# Altium PCB Indicator.PcbDoc
Units mil, origin at the board's own origin, x right, y up, seen from the top; angles counter-clockwise.
Board outline 3937.01 x 3937.01 mil, 2 copper layers (Top Layer, Bottom Layer); 75 components, 110 nets, 397 pads, 14 vias.
Unrouted connection lines stored in the file: 3.
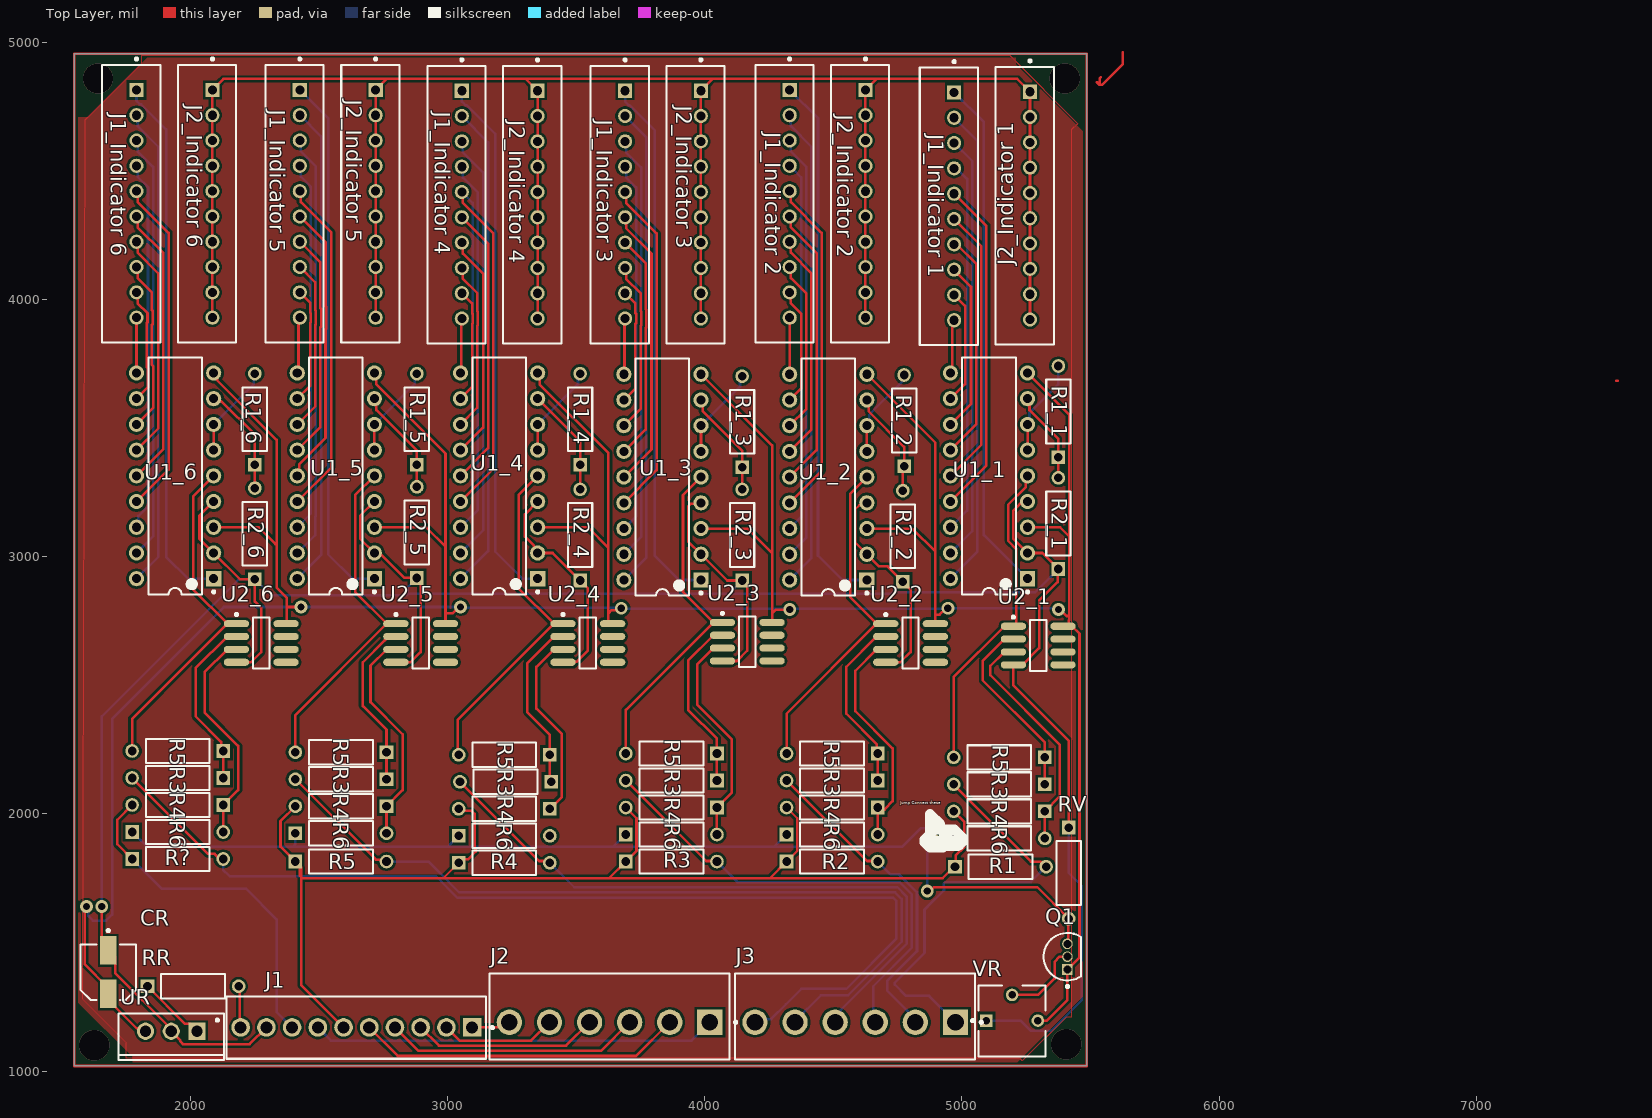
[diagram p0: Top Layer view]
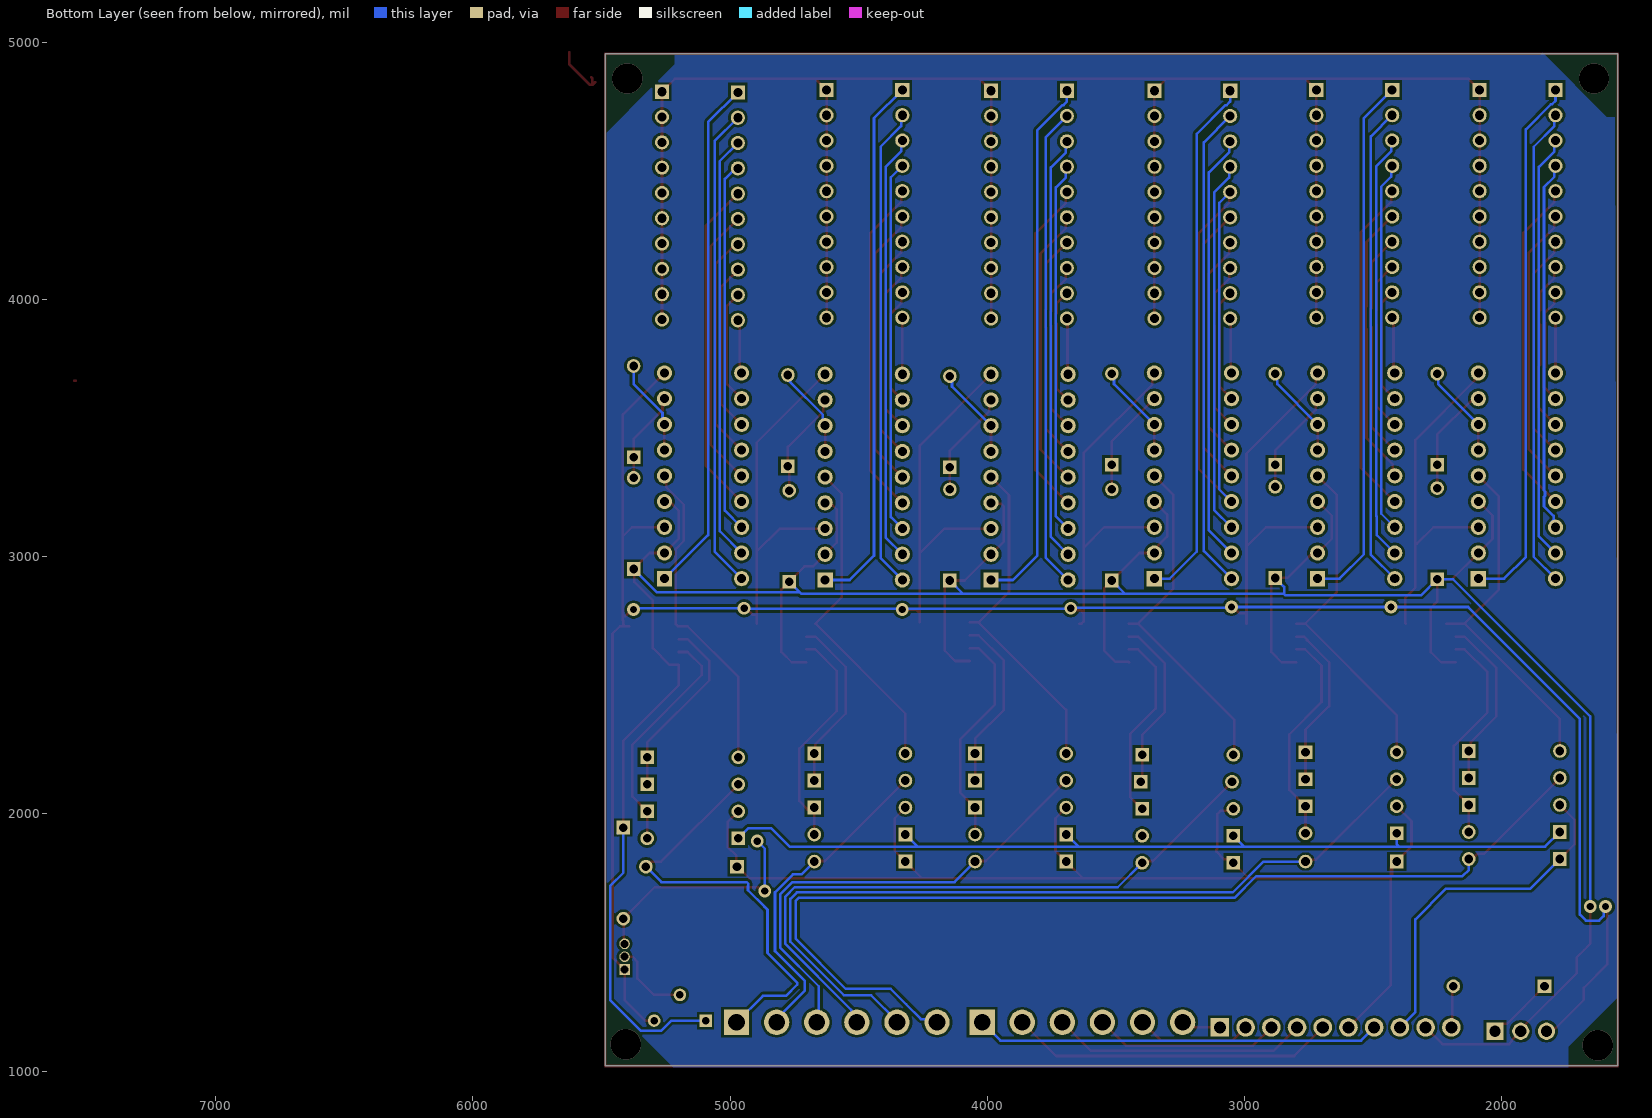
[diagram p1: Bottom Layer view, seen from below]

## Layer stack, top to bottom
Top Solder: solder mask 0.4, Solder Resist, Dk 3.5
Top Layer: signal copper 1.4
Dielectric 1: dielectric 12.6, FR-4, Dk 4.8
Bottom Layer: signal copper 1.4
Bottom Solder: solder mask 0.4, Solder Resist, Dk 3.5

## Board outline
1547.99,1020 1547.99,4957.01 5485,4957.01 5485,1020

## Design rules (kind name [scope] priority, off if disabled: settings)
Clearance [All] p1: gap=10 ignorepadtopadclearanceinfootprint=FALSE
PolygonConnect [All] p1: connectstyle=Relief reliefconductorwidth=10 reliefentries=4 polygonreliefangle="90 Angle" airgapwidth=10
RoutingVias [All] p1: holewidth=28 width=50 viastyle="Through Hole" minholewidth=28 minwidth=50 maxholewidth=28 maxwidth=50
SolderMaskExpansion [All] p1: expansion=4 istentingtop=FALSE
Width [All] p1: maxlimit=10 minlimit=10 preferedwidth=10
30 further rules are at their usual default settings.

## Classes and differential pairs
component class Reference: Q1 RV VR
component class "Indicator 6": " " "J1_Indicator 6" "J2_Indicator 6" R1_6 R2_6 R3 R4 R5 R6 U2_6
channel class Indicator: "Indicator 1" "Indicator 2" "Indicator 3" "Indicator 4" "Indicator 5" "Indicator 6"
component class Top_level: CR J1 J2 J3 R1 R2 R3 R4 R5 R? RR UR
component class "Indicator 5": " " "J1_Indicator 5" R2_5 R3 R4 R5 R6 U1_5 U2_5
component class "Indicator 4": "J1_Indicator 4" "J2_Indicator 4" R2_4 R3 R4 R5 R6 U2_4
component class "Indicator 3": "J1_Indicator 3" "J2_Indicator 3" R1_3 R2_3 R3 R4 R5 R6 U1_3 U2_3
component class "Indicator 2": "J1_Indicator 2" "J2_Indicator 2" R1_2 R2_2 R3 R4 R5 R6 U1_2 U2_2
component class "Indicator 1": "J1_Indicator 1" "J2_Indicator 1" "R1_Indicator 1" "R2_Indicator 1" R3 R4 R5 R6 U1_1 U2_1

## Components (designator, comment, footprint, x,y, rotation, side; value= is the part's Value field where it differs from the comment)
CR "EEE-1AA101WR" FP-SC-MFG 1680,1385 r270 top
J1 "22-27-2101" FP-22-27-2101-MFG 2645,1169.21 r0 top
"J1_Indicator 1" "B10B-XH-A(LF)(SN)" FP-B10B-XH-A_LF_SN-MFG 4948.94,4362.91 r90 top (schematic designator J1)
"J1_Indicator 2" "B10B-XH-A(LF)(SN)" FP-B10B-XH-A_LF_SN-MFG 4309.33,4372.91 r90 top (schematic designator J1)
"J1_Indicator 3" "B10B-XH-A(LF)(SN)" FP-B10B-XH-A_LF_SN-MFG 3669.33,4369.49 r90 top (schematic designator J1)
"J1_Indicator 4" "B10B-XH-A(LF)(SN)" FP-B10B-XH-A_LF_SN-MFG 3034.33,4369.49 r90 top (schematic designator J1)
"J1_Indicator 5" "B10B-XH-A(LF)(SN)" FP-B10B-XH-A_LF_SN-MFG 2404.33,4372.91 r90 top (schematic designator J1)
"J1_Indicator 6" "B10B-XH-A(LF)(SN)" FP-B10B-XH-A_LF_SN-MFG 1769.33,4372.91 r90 top (schematic designator J1)
J2 "B6P-VH(LF)(SN)" FP-B6P-VH_LF_SN-MFG 3629.76,1211.65 r180 top
"J2_Indicator 1" "B10B-XH-A(LF)(SN)" FP-B10B-XH-A_LF_SN-MFG 5243.94,4365.79 r90 top (schematic designator J2)
"J2_Indicator 2" "B10B-XH-A(LF)(SN)" FP-B10B-XH-A_LF_SN-MFG 4603.94,4372.64 r90 top (schematic designator J2)
"J2_Indicator 3" "B10B-XH-A(LF)(SN)" FP-B10B-XH-A_LF_SN-MFG 3963.94,4369.49 r90 top (schematic designator J2)
"J2_Indicator 4" "B10B-XH-A(LF)(SN)" FP-B10B-XH-A_LF_SN-MFG 3328.94,4369.49 r90 top (schematic designator J2)
"J2_Indicator 5" "B10B-XH-A(LF)(SN)" FP-B10B-XH-A_LF_SN-MFG 2699.33,4372.91 r90 top (schematic designator J2)
"J2_Indicator 6" "B10B-XH-A(LF)(SN)" FP-B10B-XH-A_LF_SN-MFG 2064.33,4372.91 r90 top (schematic designator J2)
J3 "B6P-VH(LF)(SN)" FP-B6P-VH_LF_SN-MFG 4584.76,1211.65 r180 top
Q1 "BC547B" ONSC-TO-92-3-29-11 5410,1445 r90 top
R1 "MFR-25FBF52-1K" RESA60-630X240 5150,1795 r0 top
R1_1 "MFR-25FBF52-1K" RESA60-630X240 5375,3565 r90 top (schematic designator R1)
R1_2 "MFR-25FBF52-1K" RESA60-630X240 4775,3530 r90 top (schematic designator R1)
R1_3 "MFR-25FBF52-1K" RESA60-630X240 4145,3525 r90 top (schematic designator R1)
R1_4 "MFR-25FBF52-1K" RESA60-630X240 3515,3535 r90 top (schematic designator R1)
R1_5 "MFR-25FBF52-1K" RESA60-630X240 2880,3535 r90 top (schematic designator R1)
R1_6 "MFR-25FBF52-1K" RESA60-630X240 2250,3535 r90 top (schematic designator R1)
R2 "MFR-25FBF52-1K" RESA60-630X240 4495,1815 r0 top
R2_1 "MFR-25FBF52-1K" RESA60-630X240 5375,3130 r90 top (schematic designator R2)
R2_2 "MFR-25FBF52-1K" RESA60-630X240 4770,3080 r90 top (schematic designator R2)
R2_3 "MFR-25FBF52-1K" RESA60-630X240 4145,3085 r90 top (schematic designator R2)
R2_4 "MFR-25FBF52-1K" RESA60-630X240 3515,3085 r90 top (schematic designator R2)
R2_5 "MFR-25FBF52-1K" RESA60-630X240 2880,3095 r90 top (schematic designator R2)
R2_6 "MFR-25FBF52-1K" RESA60-630X240 2250,3090 r90 top (schematic designator R2)
R3 "MFR-25FBF52-1K" RESA60-630X240 3870,1815 r0 top
R3 "MFR-25FBF52-1K" RESA60-630X240 1950,2140 r180 top
R3 "MFR-25FBF52-1K" RESA60-630X240 2585,2135 r180 top
R3 "MFR-25FBF52-1K" RESA60-630X240 3225,2125 r180 top
R3 "MFR-25FBF52-1K" RESA60-630X240 3870,2130 r180 top
R3 "MFR-25FBF52-1K" RESA60-630X240 4495,2130 r180 top
R3 "MFR-25FBF52-1K" RESA60-630X240 5145,2115 r180 top
R4 "MFR-25FBF52-1K" RESA60-630X240 3220,1810 r0 top
R4 "MFR-25FBF52-1K" RESA60-630X240 1950,2035 r180 top
R4 "MFR-25FBF52-1K" RESA60-630X240 2585,2030 r180 top
R4 "MFR-25FBF52-1K" RESA60-630X240 3220,2020 r180 top
R4 "MFR-25FBF52-1K" RESA60-630X240 3870,2025 r180 top
R4 "MFR-25FBF52-1K" RESA60-630X240 4495,2025 r180 top
R4 "MFR-25FBF52-1K" RESA60-630X240 5145,2010 r180 top
R5 "MFR-25FBF52-1K" RESA60-630X240 2585,1815 r0 top
R5 "MFR-25FBF52-1K" RESA60-630X240 1950,2245 r180 top
R5 "MFR-25FBF52-1K" RESA60-630X240 2585,2240 r180 top
R5 "MFR-25FBF52-1K" RESA60-630X240 3220,2230 r180 top
R5 "MFR-25FBF52-1K" RESA60-630X240 3870,2235 r180 top
R5 "MFR-25FBF52-1K" RESA60-630X240 4495,2235 r180 top
R5 "MFR-25FBF52-1K" RESA60-630X240 5145,2220 r180 top
R6 "MFR-25FBF52-1K" RESA60-630X240 1950,1930 r0 top
R6 "MFR-25FBF52-1K" RESA60-630X240 2585,1925 r0 top
R6 "MFR-25FBF52-1K" RESA60-630X240 3220,1915 r0 top
R6 "MFR-25FBF52-1K" RESA60-630X240 3870,1920 r0 top
R6 "MFR-25FBF52-1K" RESA60-630X240 4495,1920 r0 top
R6 "MFR-25FBF52-1K" RESA60-630X240 5145,1905 r0 top
R? "MFR-25FBF52-1K" RESA60-630X240 1950,1825 r0 top
RR "MFR-25FBF52-1K" RESA60-630X240 2010,1330 r0 top
RV "MFR-25FBF52-1K" RESA60-630X240 5415,1770 r270 top
U1_1 "LM3914N-1/NOPB" NFK0018A 5105,3315 r180 top (schematic designator U1)
U1_2 "LM3914N-1/NOPB" NFK0018A 4480,3310 r180 top (schematic designator U1)
U1_3 "LM3914N-1/NOPB" NFK0018A 3835,3310 r180 top (schematic designator U1)
U1_4 "LM3914N-1/NOPB" NFK0018A 3200,3315 r180 top (schematic designator U1)
U1_5 "LM3914N-1/NOPB" NFK0018A 2565,3315 r180 top (schematic designator U1)
U1_6 "LM3914N-1/NOPB" NFK0018A 1940,3315 r180 top (schematic designator U1)
U2_1 "TL072CDG4" TI-D8_M 5296.46,2655 r0 top (schematic designator U2)
U2_2 "TL072CDG4" TI-D8_M 4800,2665 r0 top (schematic designator U2)
U2_3 "TL072CDG4" TI-D8_M 4165,2670 r0 top (schematic designator U2)
U2_4 "TL072CDG4" TI-D8_M 3545,2665 r0 top (schematic designator U2)
U2_5 "TL072CDG4" TI-D8_M 2895,2665 r0 top (schematic designator U2)
U2_6 "TL072CDG4" TI-D8_M 2275,2665 r0 top (schematic designator U2)
UR "L7809CV" TO220 1925,1155 r180 top
VR "3362P-1-104LF" BOUR-3362P 5195,1195 r0 top

## Footprints (in the part's own frame and the unit in brackets; to place one, negate y for a bottom-side part, rotate by r counter-clockwise, add the part's x,y. Pads: shape width x height; smd on the part's side, far side on the other; paste and mask are expansions set on the pad)
BOUR-3362P [mm] "THD, 3-Leads, Body 6.6x6.99mm, Pitch 2.54mm"
  rect 1.25x1.25 hole 0.75: 1(-2.54,0.035)
  round 1.25 hole 0.75: 2(0,2.575) 3(2.54,0.035)
  silkscreen extent -4.02,-3.49 3.3,3.5, body extent -3.3,-3.49 3.3,3.49, height 4.95
FP-22-27-2101-MFG [mm]
  rect 1.84x1.84 hole 1.19 paste-2539.97 mask+0: 1(11.43,0.02)
  round 1.84 hole 1.19 paste-2539.97 mask+0: 2(8.89,0.02) 3(6.35,0.02) 4(3.81,0.02) 5(1.27,0.02) 6(-1.27,0.02) 7(-3.81,0.02) 8(-6.35,0.02) 9(-8.89,0.02) 10(-11.43,0.02)
  silkscreen extent -12.83,-3.08 13.55,3.08, body extent -12.93,-3.17 12.93,3.17, height 0.25
FP-B6P-VH_LF_SN-MFG [mm]
  rect 2.5x2.5 hole 1.65 paste-2539.97 mask+0: 1(-9.9,0.55)
  round 2.5 hole 1.65 paste-2539.97 mask+0: 2(-5.94,0.55) 3(-1.98,0.55) 4(1.98,0.55) 5(5.94,0.55) 6(9.9,0.55)
  silkscreen extent -12.58,-4.25 11.85,4.25, body extent -11.95,-4.35 11.95,4.35, height 0.25
FP-B10B-XH-A_LF_SN-MFG [mm]
  rect 1.4x1.4 hole 0.9 paste-2539.97 mask+0: 1(11.25,-0.525)
  round 1.4 hole 0.9 paste-2539.97 mask+0: 2(8.75,-0.525) 3(6.25,-0.525) 4(3.75,-0.525) 5(1.25,-0.525) 6(-1.25,-0.525) 7(-3.75,-0.525) 8(-6.25,-0.525) 9(-8.75,-0.525) 10(-11.25,-0.525)
  silkscreen extent -13.7,-2.88 14.42,2.88, body extent -13.8,-2.98 13.8,2.98, height 0.25
FP-SC-MFG [mm]
  rect 2.8x1.6 smd paste+0 mask+0: 1(-2.15,0) 2(2.15,0)
  silkscreen extent -4.22,-2.75 2.75,2.75, body extent -3.8,-3 3.8,3, height 0.25
NFK0018A [mm] "DIP, 18-Leads, Body 23.35x6.6mm, Pitch 2.54mm"
  rect 1.5x1.5 hole 0.9: 1(-3.81,10.16)
  round 1.5 hole 0.9: 2(-3.81,7.62) 3(-3.81,5.08) 4(-3.81,2.54) 5(-3.81,0) 6(-3.81,-2.54) 7(-3.81,-5.08) 8(-3.81,-7.62) 9(-3.81,-10.16) 10(3.81,-10.16) 11(3.81,-7.62) 12(3.81,-5.08) 13(3.81,-2.54) 14(3.81,0) 15(3.81,2.54) 16(3.81,5.08) 17(3.81,7.62) 18(3.81,10.16)
  silkscreen extent -3.94,-11.7 2.65,11.7, body extent -4.1,-11.43 4.1,11.43, height 4.21
ONSC-TO-92-3-29-11 [mm] "TO, 3-Leads, Body Dia 4.7mm, Pitch 1.27mm"
  rect 1.05x1.05 hole 0.8: 1(-1.27,0)
  round 1.05 hole 0.8: 2(0,0) 3(1.27,0)
  silkscreen extent -3.07,-1.34 2.35,2.35, body extent -2.35,-1.33 2.36,2.36, height 7.87
RESA60-630X240 [mm] "Axial Resistor, 2-Leads, Dia 2.4mm, Body Length 6.3mm"
  rect 1.35x1.35 hole 0.85: 1(-4.5,0)
  round 1.35 hole 0.85: 2(4.5,0)
  silkscreen extent -3.15,-1.2 3.15,1.2, body extent -3.15,-1.2 3.15,1.2, height 2.4
TI-D8_M [mm] "SOIC, 8-Leads, Body 4.9x3.9mm, Pitch 1.27mm, IPC Low Density"
  oval 2.5x0.7 smd: 1(-2.45,1.905) 2(-2.45,0.635) 3(-2.45,-0.635) 4(-2.45,-1.905) 5(2.45,-1.905) 6(2.45,-0.635) 7(2.45,0.635) 8(2.45,1.905)
  silkscreen extent -2.57,-2.5 0.8,2.93, body extent -2,-2.5 2,2.5, height 1.75
TO220 [mm] "TO, Thru-Hole, Vertical, Heatsink Mounted; 3 In-Line Leads; Pitch 2.54 mm"
  rect 1.7x1.7 hole 1.1: 1(-2.54,0)
  round 1.7 hole 1.1: 2(0,0) 3(2.54,0)
  silkscreen extent -5.2,-1.75 5.2,2.85, body extent -5.25,-1.8 5.25,2.9, height 19.7

## Part data
CR: library part CMP-05427-000047-1, "CAP ALUM 100UF 20% 10V SMD", Capacitance=100uF, Case/Package=Radial, Max Operating Temperature=85°C, Min Operating Temperature=-40°C, Package Quantity=1, Ripple Current=50mA, Tolerance=20%, Voltage Rating=10V, Construction=Cylindrical, Contact Plating=Tin, Diameter=5mm, Height=5.4mm, Height - Seated (Max)=0.213inch, Lead Free="Lead Free", Length=5.5mm, Life (Hours)=1000Hour, Mount="Surface Mount", Packaging="Tape and Reel", Radiation Hardening=No, Ripple Current (AC)=50mA, RoHS Compliant=Yes, Series=S, Termination=SMD/SMT, Voltage Rating (DC)=10V
J1: library part CMP-04776-001036-1, "CONN HEADER VERT 10POS 2.54MM", Color=Natural, Contact Resistance=10mR, Current Rating=4A, Flammability Rating="UL94 V-0", Housing Color=White, Insulation Resistance=50GR, Max Operating Temperature=75°C, Max Voltage Rating (AC)=250V, Min Operating Temperature=0°C, Package Quantity=4000, Contact Material=Brass, Contact Mating Length=0.295inch, Contact Plating=Tin, Contact Type="Male Pin", Depth=5.8mm, Fastening Type=Friction, Gender=Male, Glow Wire Compliant=Non-compliant, Halogen Free="Low Halogen", Height=8.38mm, Housing Material=Nylon, Lead Free="Lead Free", Length=25.4mm, Material=Nylon, Max Current Rating=4A, Mount="Through Hole", Number of Circuits=10, Number of Contacts=10, Number of Positions=10, Number of Rows=1, Orientation=Straight, Packaging=Bulk, Pitch=2.54mm, Radiation Hardening=No, RoHS Compliant=Yes, Series=KK, Termination=Solder, Voltage Rating=250V, Voltage Rating (AC)=250V, Voltage Rating (DC)=250V, Working Voltage=250V
"J1_Indicator 1" "J1_Indicator 2" "J1_Indicator 3" "J1_Indicator 4" "J1_Indicator 5" "J1_Indicator 6" "J2_Indicator 1" "J2_Indicator 2" "J2_Indicator 3" "J2_Indicator 4" "J2_Indicator 5" "J2_Indicator 6": library part CMP-17439-000145-1, "CONN HEADER VERT 10POS 2.5MM", Color=Natural, Contact Resistance=20mR, Current Rating=3A, Flammability Rating="UL94 V-0", Housing Color=White, Insulation Resistance=1GR, Max Operating Temperature=85°C, Max Voltage Rating (AC)=250V, Min Operating Temperature=-25°C, Connector Type=Header, Contact Finish - Mating=TIN, Contact Material=Brass, Contact Plating=Tin, Contact Shape=Square, Contact Type="Male Pin", Depth=5.75mm, Fastening Type=Detent, Gender=Male, Housing Material=Polyamide, Insulation Color=Natural, Insulation Material=Nylon, Lead Free="Lead Free", Lead Pitch=2.5mm, Length=27.4mm, Mated Stacking Heights=9.8mm, Max Current Rating=3A, Max Voltage Rating (DC)=250V, Mount="Through Hole", Number of Contacts=10, Number of Positions=10, Number of Rows=1, Orientation=Straight, Packaging=Bulk, Pitch=2.5mm, REACH SVHC="No SVHC", Series=XH, Termination=Solder, Voltage Rating=250V, Voltage Rating (AC)=250V, Wire/Cable Gauge=22AWG
J2 J3: library part CMP-17439-000380-1, "CONN HEADER VERT 6POS 3.96MM", Color=Natural, Contact Resistance=20mR, Current Rating=10A, Flammability Rating="UL94 V-0", Housing Color=White, Max Operating Temperature=85°C, Max Voltage Rating (AC)=250V, Min Operating Temperature=-25°C, Connector Type=Header, Contact Finish - Mating=TIN, Contact Material=Brass, Contact Mating Length=0.303inch, Contact Plating=Copper, Contact Shape=Square, Contact Type="Male Pin", Depth=8.5mm, Fastening Type=Ramp, Gender=Male, Height=8.5mm, Housing Material=Polyamide, Insulation Color=Natural, Insulation Material=Nylon, Lead Free="Lead Free", Length=23.7mm, Mated Stacking Heights=16.5mm, Max Current Rating=10A, Mount="Through Hole", Number of Contacts=6, Number of Pins=6, Number of Positions=6, Number of Rows=1, Orientation=Straight, Packaging=Bulk, Pitch=3.96mm, REACH SVHC="No SVHC", Series=VH, Termination=Solder, Voltage Rating=250V, Width=14.6mm
Q1: library part CMP-1048-01467-1, "Amplifier Transistor, NPN Silicon, 3-Pin TO-92, Bulk Box", Manufacturer="On Semiconductor", ComponentLink1Description="Manufacturer URL", ComponentLink1URL=http://www.onsemi.com/, ComponentLink2Description=Datasheet, ComponentLink2URL=http://www.onsemi.com/pub_link/Collateral/BC546-D.PDF, ComponentLink3Description="Package Specification", ComponentLink3URL=http://www.onsemi.cn/pub_link/Collateral/2N6426-D.PDF, DatasheetVersion="Rev. 7", fT Min (MHz)=150, IC Continuous (A)=0.1, Mounting Technology="Through Hole", PackageDescription="3-Pin Transistor Outline, Body 4.825 x 3.685 mm, Pitch 1.27 mm", PackageReference=TO-92-3-29-11_AM_SL, PackageVersion="Rev. AM", Packing="Bulk Box", PartNumber=BC547B, Polarity=NPN, RoHS=FALSE
R1 R1_1 R1_2 R1_3 R1_4 R1_5 R1_6 R2 R2_1 R2_2 R2_3 R2_4 R2_5 R2_6 R3 R3 R3 R3 R3 R3 R3 R4 R4 R4 R4 R4 R4 R4 R5 R5 R5 R5 R5 R5 R5 R6 R6 R6 R6 R6 R6 R? RR RV: library part CMP-1659-00075-1, "Axial Resistor, 1 KOhm, +/- 1%, 250 mW, -55 to 155 degC, 2-Pin THD, RoHS, Bulk", Case\Package=Axial, Max Operating Temperature="155 degC", Min Operating Temperature="-55 degC", Package Quantity=200, Power Rating="250 mW", Resistance="10 kohm", Tolerance=1%, Voltage Rating="250 V", ComponentLink1Description="Manufacturer URL", ComponentLink1URL=http://www.yageo.com/, ComponentLink2Description=Datasheet, ComponentLink2URL=http://www.yageo.com/documents/recent/Yageo%20LR_MFR_2013.pdf, DatasheetVersion=Apr-13, Length="0.248 inch", PackageDescription="2-Pin Axial Lead, Dia 2.4 mm, Body Length 6.3 mm", PackageReference=MFR-25, Packaging=Bulk, RoHSCompliant=true
U1_1 U1_2 U1_3 U1_4 U1_5 U1_6: library part CMP-0058-00003-3, "Dot/Bar Display Driver, 18-pin MDIP, Pb-Free", Manufacturer="Texas Instruments", PackageTopMarking=NSUZXYYTTE#*LM3914N-1, PowerWise=N, Code_JEDEC=MS-001-AC, ComponentLink1Description="Datasheet URL", ComponentLink1URL=http://www.ti.com/general/docs/lit/getliterature.tsp?genericPartNumber=LM3914&fileType=pdf, CompType="Audio IC", PackageDescription="MDIP, .900 x .250 x .155in, 18 Lead, .100in Pitch", PackageReference=NFK0018A, PinCount=18, RoHS=Y
U2_1 U2_2 U2_3 U2_4 U2_5 U2_6: library part CMP-0017-00466-1, "Dual Low-Noise JFET-Input General-Purpose Operational Amplifier, 7 to 36 V, 0 to 70 degC, 8-pin SOIC (D8), Green (RoHS & no Sb/Br)", Manufacturer="Texas Instruments", Rating=Catalog, Total Supply Voltage(Max)(+5V is 5, +/-5V is 10)=36, Total Supply Voltage(Min)(+5V is 5, +/-5V is 10)=7, CMRR(Min)(dB)=70, Code_JEDEC=MS-012, ComponentLink1Description="Manufacturer URL", ComponentLink1URL=http://www.ti.com/, ComponentLink2Description=Datasheet, ComponentLink2URL=http://www.ti.com/lit/ds/symlink/tl072.pdf, ComponentLink3Description="Package Specification", ComponentLink3URL=http://www.ti.com/litv/pdf/msoi002j, DatasheetVersion=SLOS080J, Eco-Plan="Green (RoHS & no Sb/Br)", GBW(Typ)(MHz)=3, IIB(Max)(pA)=200, Iq per channel(Max)(mA)=2.5, Mounting Technology="Surface Mount", Number of Channels=2, Offset Drift(Typ)(uV/C)=18, PackageDescription="8-Pin Plastic Small Outline, Body 4.9 x 3.9 mm, Pitch 1.27 mm", PackageReference=D8, PackageVersion="4040047-3/M, 06/2011", PartNumber=TL072CDG4, Slew Rate(Typ)(V/us)=13, Sub Family="General Purpose Amplifier, High Supply Voltage Amplifier (>=30V)", Vio (25C)(Max)(mV)=10, Vn at 1kHz(Typ)(nV/rtHz)=18
UR: library part CMP-0244-00459-1, "Positive Voltage Regulator, 9V, 3-Pin TO-220", ComponentLink1Description="Manufacturer URL", ComponentLink1URL=http://www.st.com, ComponentLink2Description=Datasheet, ComponentLink2URL=http://www.st.com/internet/com/TECHNICAL_RESOURCES/TECHNICAL_LITERATURE/DATASHEET/CD00000444.pdf, ComponentLink3Description="Package Specification", ComponentLink3URL=http://www.st.com/internet/com/TECHNICAL_RESOURCES/TECHNICAL_LITERATURE/PACKAGE_INFORMATION/CD00004649.pdf, DatasheetVersion=16/11/2011, PackageDescription="TO, Thru-Hole, Vertical, Heatsink Mounted; 3 In-Line Leads; Pitch 2.54 mm", PackageReference=TO220, PackageVersion=ver3.0
VR: library part CMP-1747-00003-1, "Square Trimpot(R) Trimming Potentiometer, 100 KOhm, 300 V, -55 to 125 degC, 3-Pin THD, RoHS, Tube", Case\Package=Axial, Max Operating Temperature="155 degC", Min Operating Temperature="-55 degC", Package Quantity=200, Power Rating="250 mW", Resistance="1 mohm", Tolerance=1%, Voltage Rating="250 V", ComponentLink1Description="Manufacturer URL", ComponentLink1URL=http://www.bourns.com/, ComponentLink2Description=Datasheet, ComponentLink2URL=http://www.bourns.com/docs/Product-Datasheets/3362.pdf, DatasheetVersion=May-16, Length="0.248 inch", Mount="Through Hole", PackageDescription="3-Pin Through Hole Device, Body 6.6 x 6.99 mm, Pitch 2.54 mm", PackageReference=3326P, Packaging=Bulk, RoHSCompliant=true

## Via types
v1: diameter 50, hole 28, Top Layer to Bottom Layer, 10 vias
v2: diameter 118.11, hole 118.11, Top Layer to Bottom Layer, 4 vias

## Nets (pads, with @x,y where several pads share a name; then routed paths per layer and width w, separated by ;. In a path a pad name is that pad's centre, name@x,y a point inside that pad or via, vN(x,y) a via of type N, cw(c..) or ccw(c..) an arc to the next point about the centre after c; other vN are vias at no path point)
NetCR_1: "J2_Indicator 1.1" "J2_Indicator 1.2" "J2_Indicator 1.3" "J2_Indicator 1.4" "J2_Indicator 1.5" "J2_Indicator 1.6" "J2_Indicator 1.7" "J2_Indicator 1.8" "J2_Indicator 1.9" "J2_Indicator 1.10" "J2_Indicator 2.1" "J2_Indicator 2.2" "J2_Indicator 2.3" "J2_Indicator 2.4" "J2_Indicator 2.5" "J2_Indicator 2.6" "J2_Indicator 2.7" "J2_Indicator 2.8" "J2_Indicator 2.9" "J2_Indicator 2.10" "J2_Indicator 3.1" "J2_Indicator 3.2" "J2_Indicator 3.3" "J2_Indicator 3.4" "J2_Indicator 3.5" "J2_Indicator 3.6" "J2_Indicator 3.7" "J2_Indicator 3.8" "J2_Indicator 3.9" "J2_Indicator 3.10" "J2_Indicator 4.1" "J2_Indicator 4.2" "J2_Indicator 4.3" "J2_Indicator 4.4" "J2_Indicator 4.5" "J2_Indicator 4.6" "J2_Indicator 4.7" "J2_Indicator 4.8" "J2_Indicator 4.9" "J2_Indicator 4.10" "J2_Indicator 5.1" "J2_Indicator 5.2" "J2_Indicator 5.3" "J2_Indicator 5.4" "J2_Indicator 5.5" "J2_Indicator 5.6" "J2_Indicator 5.7" "J2_Indicator 5.8" "J2_Indicator 5.9" "J2_Indicator 5.10" "J2_Indicator 6.1" "J2_Indicator 6.2" "J2_Indicator 6.3" "J2_Indicator 6.4" "J2_Indicator 6.5" "J2_Indicator 6.6" "J2_Indicator 6.7" "J2_Indicator 6.8" "J2_Indicator 6.9" "J2_Indicator 6.10" CR.1 J1.9 R2_1.1 R2_2.1 R2_3.1 R2_4.1 R2_5.1 R2_6.1 RV.1 U1_1.2 U1_1.4 U1_2.2 U1_2.4 U1_3.2 U1_3.4 U1_4.2 U1_4.4 U1_5.2 U1_5.4 U1_6.2 U1_6.4 U2_1.4 U2_2.4 U2_3.4 U2_4.4 U2_5.4 U2_6.4 UR.2 VR.1 | length 21834.6
  Top Layer w10: v1(1655,1640) 1655,1494.65 CR.1 1706.5,1443.15 1706.5,1381.69 1925,1163.18 UR.2 1959.27,1120.73 1959.27,1116.59 1970.86,1105 2230,1105 J1.9 ; 2085,3930 2085,4028.43 2085,4126.85 2085,4225.28 2085,4323.7 2085,4422.13 2085,4520.55 2085,4618.98 2085,4717.4 2085,4815.83 2127.56,4858.39 2762.56,4858.39 ; U1_6.4 2035,3160 2035,3070 U1_6.2 2192.17,2912.83 R2_6.1 2250,2826.07 2275,2801.07 2275,2630 2235,2590 U2_6.4 ; U1_5.4 2660,3160 2660,3070 U1_5.2 2724.39,3005.61 2744.39,3005.61 2832.17,2917.83 R2_5.1 2895,2902.83 2895,2630 2855,2590 U2_5.4 ; 2720,3930 2720,4028.43 2720,4126.85 2720,4225.28 2720,4323.7 2720,4422.13 2720,4520.55 2720,4618.98 2720,4717.4 2720,4815.83 2762.56,4858.39 ; 3349.61,3926.57 3349.61,4025 3349.61,4123.43 3349.61,4221.85 3349.61,4320.28 3349.61,4418.7 3349.61,4517.13 3349.61,4615.55 3349.61,4713.98 3349.61,4812.4 3303.62,4858.39 ; U1_4.4 3300,3165 3300,3078.56 3335.29,3043.27 3335.29,3042.98 3350,3028.27 U1_4.2 3407.83,3015 R2_4.1 3545,2877.83 3545,2635 3502.34,2592.34 3450.88,2592.34 U2_4.4 ; 3984.61,3926.57 3984.61,4025 3984.61,4123.43 3984.61,4221.85 3984.61,4320.28 3984.61,4418.7 3984.61,4517.13 3984.61,4615.55 3984.61,4713.98 3984.61,4812.4 4030.59,4858.39 ; U1_3.4 3981.33,3206.33 3946.33,3206.33 3935,3195 3935,3060 U1_3.2 4087.17,2907.83 R2_3.1 4165,2887.83 4165,2635 4125,2595 U2_3.4 ; 4624.61,3929.72 4624.61,4028.15 4624.61,4126.57 4624.61,4225 4624.61,4323.43 4624.61,4421.85 4624.61,4520.28 4624.61,4618.7 4624.61,4717.13 4624.61,4815.55 4667.44,4858.39 ; U1_2.4 4620.61,3200.61 4600.61,3200.61 4585,3185 4585,3055 U1_2.2 4677.49,2962.51 4710.32,2962.51 R2_2.1 4800,2872.83 4800,2630 4760,2590 U2_2.4 ; U1_1.4 5245.61,3205.61 5225.61,3205.61 5200,3180 5200,3070 U1_1.2 5312.83,3015 R2_1.1 5372.12,2949.95 5372.12,2902.12 5300,2830 5300,2644.57 5235.43,2580 U2_1.4 5200,2500 5415,2285 RV.1 ; 5264.61,3922.87 5264.61,4021.3 5264.61,4119.72 5264.61,4218.15 5264.61,4316.57 5264.61,4415 5264.61,4513.43 5264.61,4611.85 5264.61,4710.28 5264.61,4808.7 5214.92,4858.39 4667.44,4858.39 ; 2762.56,4858.39 3303.62,4858.39 ; 3303.62,4858.39 4030.59,4858.39 ; 4030.59,4858.39 4667.44,4858.39
  Bottom Layer w10: v1(1655,1640) 1655,2380 2187.83,2912.83 R2_6.1 2312.83,2850 2839.14,2850 2845,2855.86 ; R2_5.1 2845,2882.83 2845,2855.86 ; R2_4.1 3463.02,2855.86 ; R2_3.1 4093.02,2855.86 ; R2_2.1 4728.58,2861.42 ; VR.1 5228.2,1196.38 5267.81,1156.77 5346.41,1156.77 5465,1275.37 5465,1721.39 5415,1771.39 RV.1 RV.1@5436.57,1925.59 ; R2_1.1 5283.58,2861.42 4728.58,2861.42 ; 2845,2855.86 3463.02,2855.86 ; 3463.02,2855.86 4093.02,2855.86 ; 4093.02,2855.86 4723.02,2855.86 4728.58,2861.42
NetCR_2: CR.2 Q1.1 U1_1.3 U1_1.9 U1_2.3 U1_2.9 U1_3.3 U1_3.9 U1_4.3 U1_4.9 U1_5.3 U1_5.9 U1_6.3 U1_6.9 U2_1.8 U2_2.8 U2_3.8 U2_4.8 U2_5.8 U2_6.8 UR.3 VR.3 | length 15599.8
  Top Layer w10: v1(1595,1640) 1587.99,1632.99 1587.99,1415.98 1680,1323.98 CR.2 1680,1276.73 1790.84,1165.89 1814.11,1165.89 UR.3 ; U1_6.3 2265,3115 2330,3050 2335,3050 ; U1_6.9 2090,3701.73 2103.99,3687.74 2103.99,3686.01 2335,3455 2335,3050 ; U2_6.8 2375,2743.54 2375,2805 ; v1(2430,2805) 2375,2805 ; U1_5.3 2916.46,3115 2991.46,3040 ; U1_5.9 2722.5,3707.5 2722.5,3670.47 2991.46,3401.51 2991.46,3040 ; U2_5.8 2991.46,2780 ; v1(3050,2805) 3043.43,2805 3018.43,2780 2991.46,2780 ; U1_4.3 3545,3115 3625,3035 ; U1_4.9 3357.5,3707.5 3357.5,3670.47 3625,3402.97 3625,3035 ; U2_4.8 3633.11,2740 3625,2748.11 3625,2780 ; v1(3675,2800) 3667.35,2792.35 3637.35,2792.35 3625,2780 ; U1_3.3 4166.46,3110 4261.46,3015 ; U1_3.9 4261.46,3433.54 4261.46,3015 ; U2_3.8 4261.46,2780 ; v1(4330,2795) 4276.46,2795 4261.46,2780 ; U1_2.3 4806.46,3110 4896.46,3020 ; U1_2.9 4896.46,3443.54 4896.46,3020 ; U2_2.8 4896.46,2775 ; v1(4945,2800) 4938.43,2800 4913.43,2775 4896.46,2775 ; U1_1.3 5381.57,3115 5416.57,3080 ; U1_1.9 5416.57,3553.43 5416.57,3080 ; VR.3 5330,1196.38 5410,1276.38 Q1.1 5425.67,1410.67 5426.11,1410.67 5457.13,1441.68 5457.13,2701.22 5428.35,2730 U2_1.8@5407.72,2730 ; v1(5375,2795) 5381.57,2795 5406.57,2770 5416.57,2770 ; U2_1.8 U2_1.8@5407.72,2730 ; 2335,3050 2335,2880 2375,2840 2375,2805 ; 2991.46,2780 2991.46,3040 ; 3625,2780 3625,3035 ; 4261.46,2780 4261.46,3015 ; 4896.46,2775 4896.46,3020 ; U2_1.8@5407.72,2730 5415.84,2738.11 5415.84,2752.92 5416.57,2753.66 5416.57,2770 ; 5416.57,2770 5416.57,3080
  Bottom Layer w10: v1(1595,1640) 1602.65,1632.35 1602.65,1602.35 1620,1585 1671.57,1585 1695,1608.43 1695,2370 2130,2805 v1(2430,2805) v1(3050,2805) 3052.5,2802.5 3672.5,2802.5 v1(3675,2800) 3677.5,2797.5 4327.5,2797.5 v1(4330,2795) 4332.5,2797.5 4942.5,2797.5 v1(4945,2800) 5370,2800 v1(5375,2795)
NetJ1_1: J1.1 J2.6 | length 153.3
  Top Layer w10: J1.1 3196.07,1170 3216.07,1190 J2.6
NetJ1_2: J1.2 J2.5 | length 451.6
  Top Layer w10: J1.2 3046.22,1118.78 3324.68,1118.78 J2.5
NetJ1_3: J1.3 J2.4 | length 724.1
  Top Layer w10: J1.3 2966.22,1098.78 3460.59,1098.78 J2.4
NetJ1_4: J1.4 J2.3 | length 996.6
  Top Layer w10: J1.4 2886.22,1078.78 3596.5,1078.78 J2.3
NetJ1_5: J1.5 J2.2 | length 1269
  Top Layer w10: J1.5 2806.22,1058.78 3732.4,1058.78 J2.2
NetJ1_6: J1.6 Q1.3 R1.1 R2.1 R3.1@3692.83,1815 R4.1@3042.83,1810 R4.2@2407.83,2030 R4.2@3042.83,2020 R4.2@3692.83,2025 R4.2@4317.83,2025 R4.2@4967.83,2010 R5.1@2407.83,1815 RV.2 | length 5812.2
  Top Layer w10: R4.2@2407.83,2030 2350,1972.17 2350,1872.83 2407.83,1815 R5.1@2425,1797.83 ; J1.6 2430,1335 2430,1792.83 R5.1@2425,1797.83 ; R4.2@3042.83,2020 3051.09,2011.74 3093.26,2011.74 3105,2000 3105,1865 3108.36,1861.64 3108.36,1853.36 3078.55,1823.55 3056.39,1823.55 2982.83,1750 ; R4.2@3692.83,2025 3734.41,1983.43 3734.41,1856.57 3692.83,1815 3627.83,1750 ; R4.2@4317.83,2025 4359.41,1983.43 4359.41,1856.57 R2.1 4252.83,1750 ; v1(4865,1700) 4875.82,1700 4890.82,1715 5292.83,1715 RV.2 5412.5,1590.33 5412.5,1497.5 Q1.3 ; R4.2@4967.83,2010 5009.41,1968.43 5009.41,1872.21 4975,1837.8 4975,1800 4925,1750 4252.83,1750 ; R5.1@2425,1797.83 2425,1760 2435,1750 2982.83,1750 ; 2982.83,1750 3627.83,1750 ; 3627.83,1750 4252.83,1750
  Bottom Layer w10: v1(4865,1700) 4865,1865 v1(4894.22,1894.22)
NetJ1_7: J1.7 J2.1 | length 1575.2
  Bottom Layer w10: J1.7 2546.22,1118.78 3948.31,1118.78 J2.1
NetJ1_8: J1.8 R4.2@1772.83,2035 R?.1 | length 1362.3
  Top Layer w10: R?.1 1715,1882.83 1715,1977.17 R4.2@1772.83,2035
  Bottom Layer w10: R?.1 1887.83,1710 2215,1710 2335,1590 2335,1230 J1.8
NetJ1_10: J1.10 RR.2 | length 163.2
  Top Layer w10: RR.2 2191.08,1326.08 2191.08,1173.92 J1.10
"NetJ1_Indicator 1 _1": "J1_Indicator 1.1" U1_1.1 | length 2009
  Bottom Layer w10: 4969.61,4805.83 5085,4690.43 5085,3085 U1_1.1
"NetJ1_Indicator 1 _2": "J1_Indicator 1.2" U1_1.18 | length 1873.3
  Bottom Layer w10: U1_1.18 5060,3020 5060,4617.01 4969.61,4707.4
"NetJ1_Indicator 1 _3": "J1_Indicator 1.3" U1_1.17 | length 1658.3
  Bottom Layer w10: U1_1.17 5040,3100 5040,4538.58 4969.61,4608.98
"NetJ1_Indicator 1 _4": "J1_Indicator 1.4" U1_1.16 | length 1449.1
  Bottom Layer w10: U1_1.16 5020,3180 5020,4470 4979.45,4510.55 4969.61,4510.55
"NetJ1_Indicator 1 _5": "J1_Indicator 1.5" U1_1.15 | length 1307.1
  Top Layer w10: U1_1.15 5095,3355 5095,4286.73 4969.61,4412.13
"NetJ1_Indicator 1 _6": "J1_Indicator 1.6" U1_1.14 | length 1092.1
  Top Layer w10: U1_1.14 5075,3435 5075,4208.31 4969.61,4313.7
"NetJ1_Indicator 1 _7": "J1_Indicator 1.7" U1_1.13 | length 883
  Top Layer w10: U1_1.13 5055,3515 5055,4140 4979.72,4215.28 4969.61,4215.28
"NetJ1_Indicator 1 _8": "J1_Indicator 1.8" U1_1.12 | length 662.1
  Top Layer w10: U1_1.12 5035,3595 5035,4050 4969.61,4115.39 4969.61,4116.85
"NetJ1_Indicator 1 _9": "J1_Indicator 1.9" U1_1.11 | length 444.7
  Top Layer w10: U1_1.11 5012.17,3672.17 5012.17,3975.87 4969.61,4018.43
"NetJ1_Indicator 1 _10": "J1_Indicator 1.10" U1_1.10 | length 211.1
  Top Layer w10: U1_1.10 4962.3,3722.3 4962.3,3912.7 4969.61,3920
"NetJ1_Indicator 2_1": "J1_Indicator 2.1" U1_2.1 | length 2085.7
  Bottom Layer w10: 4330,4815.83 4440,4705.83 4440,3005 4535,2910 U1_2.1
"NetJ1_Indicator 2_2": "J1_Indicator 2.2" U1_2.18 | length 1877.4
  Bottom Layer w10: U1_2.18 4414.53,2994.53 4414.53,4594.64 4334.32,4674.84 4334.32,4713.08 4330,4717.4
"NetJ1_Indicator 2_3": "J1_Indicator 2.3" U1_2.17 | length 1662.4
  Bottom Layer w10: U1_2.17 4394.53,3074.53 4394.53,4516.21 4334.32,4576.42 4334.32,4614.65 4330,4618.98
"NetJ1_Indicator 2_4": "J1_Indicator 2.4" U1_2.16 | length 1447.4
  Bottom Layer w10: U1_2.16 4374.53,3154.53 4374.53,4476.02 4330,4520.55
"NetJ1_Indicator 2_5": "J1_Indicator 2.5" U1_2.15 | length 1315.3
  Top Layer w10: U1_2.15 4454.53,3334.53 4454.53,4259.36 4334.32,4379.57 4334.32,4417.8 4330,4422.13
"NetJ1_Indicator 2_6": "J1_Indicator 2.6" U1_2.14 | length 1100.3
  Top Layer w10: U1_2.14 4434.53,3414.53 4434.53,4180.94 4334.32,4281.14 4334.32,4319.38 4330,4323.7
"NetJ1_Indicator 2_7": "J1_Indicator 2.7" U1_2.13 | length 885.3
  Top Layer w10: U1_2.13 4414.53,3494.53 4414.53,4102.51 4334.32,4182.72 4334.32,4220.95 4330,4225.28
"NetJ1_Indicator 2_8": "J1_Indicator 2.8" U1_2.12 | length 670.3
  Top Layer w10: U1_2.12 4394.53,3574.53 4394.53,4024.09 4334.32,4084.29 4334.32,4122.53 4330,4126.85
"NetJ1_Indicator 2_9": "J1_Indicator 2.9" U1_2.11 | length 455.3
  Top Layer w10: U1_2.11 4374.53,3654.53 4374.53,3945.66 4334.32,3985.87 4334.32,4024.1 4330,4028.43
"NetJ1_Indicator 2_10": "J1_Indicator 2.10" U1_2.10 | length 220
  Top Layer w10: U1_2.10 4330,3930
"NetJ1_Indicator 3_1": "J1_Indicator 3.1" U1_3.1 | length 2076.9
  Bottom Layer w10: 3690,4812.4 3690,4769.84 3703.31,4756.54 3707.63,4756.54 3805,4659.16 3805,3005 3900,2910 U1_3.1
"NetJ1_Indicator 3_2": "J1_Indicator 3.2" U1_3.18 | length 1874.4
  Bottom Layer w10: U1_3.18 3772.56,2997.56 3772.56,3441.98 3772.56,3535.84 3772.56,4631.42 3690,4713.98
"NetJ1_Indicator 3_3": "J1_Indicator 3.3" U1_3.17 | length 1659.4
  Bottom Layer w10: U1_3.17 3752.56,3077.56 3752.56,3433.7 3752.56,3544.13 3752.56,4514.75 3694.32,4572.99 3694.32,4611.23 3690,4615.55
"NetJ1_Indicator 3_4": "J1_Indicator 3.4" U1_3.16 | length 1444.5
  Bottom Layer w10: U1_3.16 3732.56,3157.56 3732.56,4436.33 3694.32,4474.57 3694.32,4512.8 3690,4517.13
"NetJ1_Indicator 3_5": "J1_Indicator 3.5" U1_3.15 | length 1312.3
  Top Layer w10: U1_3.15 3812.56,3337.56 3812.56,4257.9 3694.32,4376.14 3694.32,4414.38 3690,4418.7
"NetJ1_Indicator 3_6": "J1_Indicator 3.6" U1_3.14 | length 1097.3
  Top Layer w10: U1_3.14 3792.56,3417.56 3792.56,4179.48 3694.32,4277.72 3694.32,4315.95 3690,4320.28
"NetJ1_Indicator 3_7": "J1_Indicator 3.7" U1_3.13 | length 882.3
  Top Layer w10: U1_3.13 3770,3495 3770,3889.82 3772.56,3892.38 3772.56,3960.77 3770,3963.33 3770,4141.85 3690,4221.85
"NetJ1_Indicator 3_8": "J1_Indicator 3.8" U1_3.12 | length 667.3
  Top Layer w10: U1_3.12 3750,3575 3750,3898.1 3752.56,3900.66 3752.56,3952.49 3750,3955.05 3750,4025.19 3694.32,4080.87 3694.32,4119.1 3690,4123.43
"NetJ1_Indicator 3_9": "J1_Indicator 3.9" U1_3.11 | length 452.3
  Top Layer w10: U1_3.11 3730,3655 3730,3906.39 3732.56,3908.95 3732.56,3944.2 3730,3946.76 3730,3985 3690,4025
"NetJ1_Indicator 3_10": "J1_Indicator 3.10" U1_3.10 | length 218.6
  Top Layer w10: U1_3.10 3687.5,3712.5 3687.5,3924.07 3690,3926.57
"NetJ1_Indicator 4_1": "J1_Indicator 4.1" U1_4.1 | length 2057.3
  Bottom Layer w10: 3055,4812.4 3055,4769.84 3068.31,4756.54 3072.63,4756.54 3185,4644.16 3185,3020 3290,2915 U1_4.1
"NetJ1_Indicator 4_2": "J1_Indicator 4.2" U1_4.18 | length 1886
  Bottom Layer w10: U1_4.18 3157.56,3022.56 3157.56,4611.42 3055,4713.98
"NetJ1_Indicator 4_3": "J1_Indicator 4.3" U1_4.17 | length 1671
  Bottom Layer w10: U1_4.17 3137.56,3102.56 3137.56,4494.75 3059.32,4572.99 3059.32,4611.23 3055,4615.55
"NetJ1_Indicator 4_4": "J1_Indicator 4.4" U1_4.16 | length 1456
  Bottom Layer w10: U1_4.16 3117.56,3182.56 3117.56,4416.33 3059.32,4474.57 3059.32,4512.8 3055,4517.13
"NetJ1_Indicator 4_5": "J1_Indicator 4.5" U1_4.15 | length 2548.3
  Top Layer w10: U1_4.15 3177.56,3342.56 3177.56,4257.9 3059.32,4376.14 3059.32,4414.38 3055,4418.7
  Bottom Layer w10: U1_4.15 3097.56,3262.56 3097.56,4376.14 3055,4418.7
"NetJ1_Indicator 4_6": "J1_Indicator 4.6" U1_4.14 | length 1092.3
  Top Layer w10: U1_4.14 3157.56,3422.56 3157.56,4217.72 3055,4320.28
"NetJ1_Indicator 4_7": "J1_Indicator 4.7" U1_4.13 | length 877.3
  Top Layer w10: U1_4.13 3137.56,3502.56 3137.56,4101.05 3059.32,4179.29 3059.32,4217.53 3055,4221.85
"NetJ1_Indicator 4_8": "J1_Indicator 4.8" U1_4.12 | length 662.3
  Top Layer w10: U1_4.12 3115,3580 3115,3898.1 3117.56,3900.66 3117.56,3952.49 3115,3955.05 3115,4025.19 3059.32,4080.87 3059.32,4119.1 3055,4123.43
"NetJ1_Indicator 4_9": "J1_Indicator 4.9" U1_4.11 | length 447.3
  Top Layer w10: U1_4.11 3095,3660 3095,3906.39 3097.56,3908.95 3097.56,3944.2 3095,3946.76 3095,3985 3055,4025
"NetJ1_Indicator 4_10": "J1_Indicator 4.10" U1_4.10 | length 213.6
  Top Layer w10: U1_4.10 3052.5,3717.5 3052.5,3924.07 3055,3926.57
"NetJ1_Indicator 5_1": "J1_Indicator 5.1" U1_5.1 | length 2070.7
  Bottom Layer w10: 2425,4815.83 2535,4705.83 2535,3010 2630,2915 U1_5.1
"NetJ1_Indicator 5_2": "J1_Indicator 5.2" U1_5.18 | length 1874.9
  Bottom Layer w10: U1_5.18 2507.56,3007.56 2507.56,4634.84 2425,4717.4
"NetJ1_Indicator 5_3": "J1_Indicator 5.3" U1_5.17 | length 1659.9
  Bottom Layer w10: U1_5.17 2485,3085 2485,3156.72 2487.56,3159.27 2487.56,3904.09 2487.56,3955.91 2487.56,4002.51 2487.56,4054.34 2487.56,4100.94 2487.56,4152.76 2487.56,4199.36 2487.56,4251.19 2487.56,4297.79 2487.56,4349.61 2487.56,4396.21 2487.56,4518.18 2429.32,4576.42 2429.32,4614.65 2425,4618.98
"NetJ1_Indicator 5_4": "J1_Indicator 5.4" U1_5.16 | length 1445
  Bottom Layer w10: U1_5.16 2467.56,3167.56 2467.56,3912.37 2467.56,4439.75 2429.32,4477.99 2429.32,4516.23 2425,4520.55
"NetJ1_Indicator 5_5": "J1_Indicator 5.5" U1_5.15 | length 1312.8
  Top Layer w10: U1_5.15 2547.56,3347.56 2547.56,4261.33 2429.32,4379.57 2429.32,4417.8 2425,4422.13
"NetJ1_Indicator 5_6": "J1_Indicator 5.6" U1_5.14 | length 1097.8
  Top Layer w10: U1_5.14 2422.5,3322.5 2422.5,3359.53 2525,3462.03 2525,3884.96 2527.56,3887.52 2527.56,3972.48 2525,3975.04 2525,4223.7 2425,4323.7
"NetJ1_Indicator 5_7": "J1_Indicator 5.7" U1_5.13 | length 882.8
  Top Layer w10: U1_5.13 2505,3505 2505,3893.24 2507.56,3895.8 2507.56,3964.2 2505,3966.76 2505,4145.28 2425,4225.28
"NetJ1_Indicator 5_8": "J1_Indicator 5.8" U1_5.12 | length 667.8
  Top Layer w10: U1_5.12 2485,3585 2485,3901.53 2487.56,3904.09 2487.56,3955.91 2485,3958.47 2485,4066.85 2425,4126.85
"NetJ1_Indicator 5_9": "J1_Indicator 5.9" U1_5.11 | length 452.8
  Top Layer w10: U1_5.11 2465,3665 2465,3909.81 2467.56,3912.37 2467.56,3947.63 2465,3950.19 2465,3988.43 2425,4028.43
"NetJ1_Indicator 5_10": "J1_Indicator 5.10" U1_5.10 | length 219.1
  Top Layer w10: U1_5.10 2420,3720 2420,3925 2425,3930
"NetJ1_Indicator 6_1": "J1_Indicator 6.1" U1_6.1 | length 2086.2
  Bottom Layer w10: 1790,4815.83 1790,4773.27 1803.31,4759.96 1807.63,4759.96 1905,4662.59 1905,3000 1990,2915 U1_6.1
"NetJ1_Indicator 6_2": "J1_Indicator 6.2" U1_6.18 | length 1872.4
  Bottom Layer w10: U1_6.18 1874.53,2999.53 1874.53,4594.64 1794.32,4674.84 1794.32,4713.08 1790,4717.4
"NetJ1_Indicator 6_3": "J1_Indicator 6.3" U1_6.17 | length 1657.4
  Bottom Layer w10: U1_6.17 1854.53,3079.53 1854.53,4516.21 1794.32,4576.42 1794.32,4614.65 1790,4618.98
"NetJ1_Indicator 6_4": "J1_Indicator 6.4" U1_6.16 | length 1454.1
  Bottom Layer w10: U1_6.16 1807.34,3132.34 1797.11,3142.57 1797.11,3159.14 1834.53,3196.56 1834.53,3233.44 1830.63,3237.34 1830.63,3253.91 1834.53,3257.81 1834.53,4437.79 1794.32,4477.99 1794.32,4516.23 1790,4520.55
"NetJ1_Indicator 6_5": "J1_Indicator 6.5" U1_6.15 | length 1310.3
  Top Layer w10: U1_6.15 1914.53,3339.53 1914.53,4259.36 1794.32,4379.57 1794.32,4417.8 1790,4422.13
"NetJ1_Indicator 6_6": "J1_Indicator 6.6" U1_6.14 | length 1095.3
  Top Layer w10: U1_6.14 1894.53,3419.53 1894.53,4180.94 1794.32,4281.14 1794.32,4319.38 1790,4323.7
"NetJ1_Indicator 6_7": "J1_Indicator 6.7" U1_6.13 | length 880.3
  Top Layer w10: U1_6.13 1874.53,3499.53 1874.53,4102.51 1794.32,4182.72 1794.32,4220.95 1790,4225.28
"NetJ1_Indicator 6_8": "J1_Indicator 6.8" U1_6.12 | length 667.4
  Top Layer w10: U1_6.12 1854.53,3579.53 1854.53,3741.73 1850,3746.26 1850,3901.53 1852.56,3904.09 1852.56,3955.91 1850,3958.47 1850,4028.61 1794.32,4084.29 1794.32,4122.53 1790,4126.85
"NetJ1_Indicator 6_9": "J1_Indicator 6.9" U1_6.11 | length 452.4
  Top Layer w10: U1_6.11 1834.53,3659.53 1834.53,3733.44 1830.63,3737.34 1830,3737.97 1830,3909.81 1832.56,3912.37 1832.56,3947.63 1794.32,3985.87 1794.32,4024.1 1790,4028.43
"NetJ1_Indicator 6_10": "J1_Indicator 6.10" U1_6.10 | length 215
  Top Layer w10: U1_6.10 1790,3930
NetJ3_1: J3.1 R1.2 R3.2@4967.83,2115 | length 1686
  Top Layer w10: R3.2@4967.83,2115 5267.83,1815 5305,1815 5320,1800 R1.2@5329.33,1800
  Bottom Layer w10: J3.1 4871.99,1292.54 4782.46,1292.54 4739.14,1335.86 4739.14,1344.14 4854.27,1459.27 4854.27,1628.05 4860.13,1633.91 4860.48,1633.91 4866.57,1640 4930,1703.43 4930,1720 4929.14,1720.86 4929.14,1729.14 4935,1735 5267.17,1735 R1.2
NetJ3_2: J3.2 R2.2 R3.2@4317.83,2130 | length 1280
  Top Layer w10: R3.2@4317.83,2130 4630.59,1817.24 4669.92,1817.24 R2.2
  Bottom Layer w10: R2.2 4722.17,1765 4755,1765 4825,1695 4825,1466.81 4710,1351.81 4710,1311.81 4818.62,1203.19 J3.2@4818.62,1195
NetJ3_3: J3.3 R3.2@3692.83,2130 R3.2@4047.17,1815 | length 1857.8
  Top Layer w10: R3.2@3692.83,2130 4005.59,1817.24 4044.92,1817.24 R3.2@4047.17,1815
  Bottom Layer w10: R3.2@4047.17,1815 4127.17,1735 4695,1735 4756.72,1735 4805,1686.72 4805,1480 4655,1330 4655,1197.72 J3.3
NetJ3_4: J3.4 R3.2@3047.83,2125 R4.2@3397.17,1810 | length 2525.8
  Top Layer w10: R3.2@3047.83,2125 3355.59,1817.24 3389.92,1817.24 R4.2@3397.17,1810
  Bottom Layer w10: R4.2@3397.17,1810 3492.17,1715 4368.53,1715 4748.43,1715 4785,1678.43 4785,1494.77 4528.92,1238.7 4528.92,1236.04 4506.81,1213.93 J3.4
NetJ3_5: J3.5 R3.2@2407.83,2135 R5.2@2762.17,1815 | length 3258.5
  Top Layer w10: R3.2@2407.83,2135 2720.59,1822.24 2754.92,1822.24 R5.2@2762.17,1815
  Bottom Layer w10: R5.2@2762.17,1815 2925,1815 3045,1695 4740.15,1695 4765,1670.15 4765,1503.06 4556.94,1295 4450.91,1295 J3.5@4350.91,1195
NetJ3_6: J3.6 R3.2@1772.83,2140 R?.2 | length 4027.9
  Top Layer w10: R3.2@1772.83,2140 2067.83,1845 2093.87,1845 2099.7,1839.17 cw(c2085.59,1825) 2099.76,1839.11 2105.59,1833.28 2105.59,1827.24 2124.92,1827.24 R?.2
  Bottom Layer w10: R?.2 2127.17,1782.83 2151.96,1758.04 2953.68,1758.04 3037.84,1673.87 4732.99,1673.87 4745,1661.86 4745,1515 4550,1320 4375,1320 4315.1,1260.1 4257.23,1202.23 4202.23,1202.23 J3.6@4195,1195
NetQ1_2: Q1.2 VR.2 | length 314.6
  Top Layer w10: VR.2 5296.38,1296.38 5360,1360 5360,1425 5380,1445 Q1.2
"NetR1_Indicator 1 _1": R1_1.1 R2_1.2 U1_1.8 | length 368.1
  Top Layer w10: U1_1.8 5262.5,3607.5 5262.5,3570.47 5375,3457.97 R1_1.1 R2_1.2
  Bottom Layer w10: U1_1.8 U1_1.8@5262.5,3607.5
"NetR1_Indicator 1 _2": R1_1.2 U1_1.6 U1_1.7 | length 376.9
  Top Layer w10: U1_1.6 U1_1.7
  Bottom Layer w10: U1_1.7 5262.5,3522.5 5262.5,3559.53 5375,3672.03 R1_1.2
"NetR1_Indicator 2_1": R1_2.1 R2_2.2 U1_2.8 | length 435.3
  Top Layer w10: U1_2.8 4637.5,3602.5 4637.5,3565.47 4775,3427.97 R1_2.1 4770,3347.83 R2_2.2
  Bottom Layer w10: U1_2.8 U1_2.8@4639.39,3600.61 ; R1_2.1@4770,3347.83 R1_2.1
"NetR1_Indicator 2_2": R1_2.2 U1_2.6 U1_2.7 | length 357.2
  Top Layer w10: U1_2.6 U1_2.7
  Bottom Layer w10: U1_2.7 4639.39,3519.39 4639.39,3552.66 4766.74,3680.02 4766.74,3698.91 R1_2.2
"NetR1_Indicator 3_1": R1_3.1 R2_3.2 U1_3.8 | length 414.1
  Top Layer w10: U1_3.8 3992.5,3602.5 3992.5,3565.47 4145,3412.97 R1_3.1 R2_3.2
"NetR1_Indicator 3_2": R1_3.2 U1_3.6 U1_3.7 | length 370.1
  Top Layer w10: U1_3.6 U1_3.7 ; R1_3.2@4136.74,3693.91 R1_3.2
  Bottom Layer w10: U1_3.7 4136.74,3661.74 4136.74,3693.91 R1_3.2
"NetR1_Indicator 4_1": R1_4.1 R2_4.2 U1_4.8 | length 431.8
  Top Layer w10: U1_4.8 3515,3450 R1_4.1 R2_4.2
  Bottom Layer w10: U1_4.8 U1_4.8@3357.5,3607.5
"NetR1_Indicator 4_2": R1_4.2 U1_4.6 U1_4.7 | length 377.2
  Top Layer w10: U1_4.6 U1_4.7 ; R1_4.2@3506.74,3703.91 R1_4.2
  Bottom Layer w10: U1_4.7 3506.74,3671.74 3506.74,3703.91 R1_4.2
"NetR1_Indicator 5_1": R1_5.1 R2_5.2 U1_5.8 | length 411.2
  Top Layer w10: U1_5.8 2722.5,3607.5 2722.5,3570.47 2880,3412.97 R1_5.1 R2_5.2
"NetR1_Indicator 5_2": R1_5.2 U1_5.6 U1_5.7 | length 377.2
  Top Layer w10: U1_5.6 U1_5.7 ; R1_5.2@2871.74,3703.91 R1_5.2
  Bottom Layer w10: U1_5.7 2871.74,3671.74 2871.74,3703.91 R1_5.2
"NetR1_Indicator 6_1": R1_6.1 R2_6.2 U1_6.8 | length 436.4
  Top Layer w10: U1_6.8 2099.39,3605.61 2119.39,3605.61 2250,3475 R1_6.1 R2_6.2
  Bottom Layer w10: U1_6.8 U1_6.8@2097.5,3607.5
"NetR1_Indicator 6_2": R1_6.2 U1_6.6 U1_6.7 | length 372.9
  Top Layer w10: U1_6.7 U1_6.6 U1_6.6@2096.69,3408.31
  Bottom Layer w10: U1_6.7 2245.59,3670.59 2245.59,3707.76 R1_6.2
"NetR3_Indicator 1 _1": R3.1@5322.17,2115 R5.1@5322.17,2220 U2_1.2 | length 735.8
  Top Layer w10: U2_1.2 5164.57,2680 5080,2595.43 5080,2520 5322.17,2277.83 R3.1@5322.17,2115
"NetR3_Indicator 2_1": R3.1@4672.17,2130 R5.1@4672.17,2235 U2_2.2 | length 695
  Top Layer w10: R3.1@4672.17,2130 4672.17,2235 4669.28,2237.88 4669.28,2270.72 4550,2390 4550,2571.89 4668.11,2690 U2_2.2
"NetR3_Indicator 3_1": R3.1@4047.17,2130 R5.1@4047.17,2235 U2_3.2 | length 687.5
  Top Layer w10: R3.1@4047.17,2130 4047.17,2235 4047.17,2292.83 3935,2405 3935,2596.89 4033.11,2695 U2_3.2
"NetR3_Indicator 4_1": R3.1@3402.17,2125 R5.1@3397.17,2230 U2_4.2 | length 681.3
  Top Layer w10: R3.1@3402.17,2125 3397.17,2130 3397.17,2230 3397.17,2307.83 3310,2395 3310,2586.89 3413.11,2690 U2_4.2
"NetR3_Indicator 5_1": R3.1@2762.17,2135 R5.1@2762.17,2240 U2_5.2 | length 685.6
  Top Layer w10: R3.1@2747.17,2150 2762.17,2135 2762.17,2240 2762.17,2327.83 2670,2420 2670,2590 2756.2,2676.2 2756.2,2678.34 2767.86,2690 U2_5.2
"NetR3_Indicator 6_1": R3.1@2127.17,2140 R5.1@2127.17,2245 U2_6.2 | length 680.8
  Top Layer w10: R3.1@2127.17,2140 2127.17,2245 2119.28,2252.88 2119.28,2280.72 2020,2380 2020,2566.89 2143.11,2690 U2_6.2
"NetR4_Indicator 1 _1": R4.1@5322.17,2010 R6.2@5322.17,1905 U2_1.3 | length 918.8
  Top Layer w10: U2_1.3 5164.57,2630 5110,2575.43 5110,2540 5380,2270 5380,2067.83 5322.17,2010 R6.2@5322.17,1905
"NetR4_Indicator 2_1": R4.1@4672.17,2025 R6.2@4672.17,1920 U2_2.3 | length 901.3
  Top Layer w10: R6.2@4672.17,1920 4672.17,2025 4680,2017.17 4700,2017.17 4700,2020 4730,2050 4730,2255 4585,2400 4585,2556.89 4668.11,2640 U2_2.3
"NetR4_Indicator 3_1": R4.1@4047.17,2025 R6.2@4047.17,1920 U2_3.3 | length 866.4
  Top Layer w10: R6.2@4047.17,1920 4047.17,2025 4105,2082.83 4105,2290 3970,2425 3970,2581.89 4033.11,2645 U2_3.3
"NetR4_Indicator 4_1": R4.1@3397.17,2020 R6.2@3397.17,1915 U2_4.3 | length 743.8
  Top Layer w10: R4.1@3397.17,2020 3443.74,2066.57 3443.74,2311.26 3345,2410 3345,2571.89 3413.11,2640 U2_4.3
"NetR4_Indicator 5_1": R4.1@2762.17,2030 R6.2@2762.17,1925 U2_5.3 | length 854.4
  Top Layer w10: R6.2@2762.17,1925 2762.17,2030 2825,2092.83 2825,2310 2700,2435 2700,2576.89 2763.11,2640 U2_5.3
"NetR4_Indicator 6_1": R4.1@2127.17,2035 R6.2@2127.17,1930 U2_6.3 | length 859.7
  Top Layer w10: R6.2@2127.17,1930 2127.17,2035 2185,2092.83 2185,2265 2055,2395 2055,2551.89 2143.11,2640 U2_6.3
"NetR5_Indicator 1 _2": R5.2@4967.83,2220 U1_1.5 U2_1.1 | length 1261.3
  Top Layer w10: R5.2@4967.83,2220 4967.83,2533.27 5164.57,2730 U2_1.1 5202.36,2730 5210.47,2738.11 5210.47,3031.24 5180,3061.72 5180,3202.97 5247.5,3270.47 5247.5,3307.5 U1_1.5
"NetR5_Indicator 2_2": R5.2@4317.83,2235 U1_2.5 U2_2.1 | length 1289.7
  Top Layer w10: R5.2@4317.83,2235 4317.83,2389.72 4668.11,2740 4565,2843.11 4565,3245 U1_2.5
"NetR5_Indicator 3_2": R5.2@3692.83,2235 U1_3.5 U2_3.1 | length 1329.3
  Top Layer w10: R5.2@3692.83,2235 3692.83,2404.72 U2_3.1@4033.11,2745 ; U1_3.5 3915,3240 3915,2863.11 U2_3.1@4033.11,2745 ; U2_3.1 U2_3.1@4033.11,2745
"NetR5_Indicator 4_2": R5.2@3042.83,2230 U1_4.5 U2_4.1 | length 1363.9
  Top Layer w10: R5.2@3042.83,2230 3040,2232.83 3040,2366.89 U2_4.1@3413.11,2740 ; U1_4.5 3275.58,3240.58 3275.58,2877.53 U2_4.1@3413.11,2740 ; U2_4.1 U2_4.1@3413.11,2740
"NetR5_Indicator 5_2": R5.2@2407.83,2240 U1_5.5 U2_5.1 | length 1339.7
  Top Layer w10: R5.2@2407.83,2240 2407.83,2384.72 U2_5.1@2763.11,2740 ; U1_5.5 2640,3240 2640,2863.11 U2_5.1@2763.11,2740 ; U2_5.1 U2_5.1@2763.11,2740
"NetR5_Indicator 6_2": R5.2@1772.83,2245 U1_6.5 U2_6.1 | length 1382.5
  Top Layer w10: R5.2@1772.83,2245 1772.83,2369.72 U2_6.1@2143.11,2740 ; U1_6.5 2010,3235 2010,2873.11 U2_6.1@2143.11,2740 ; U2_6.1@2213.98,2740 U2_6.1 U2_6.1@2143.11,2740
"NetR6_Indicator 1 _1": R6.1 | length 3514.5
  Bottom Layer w10: R6.1@1772.83,1930 1830,1872.83 2397.83,1872.83 ; R6.1@2407.83,1925 2407.83,1882.83 2397.83,1872.83 ; R6.1@3042.83,1915 3000.67,1872.83 ; R6.1@3692.83,1920 3645.67,1872.83 ; R6.1@4317.83,1920 4270.67,1872.83 ; R6.1@4967.83,1905 4927.83,1945 4840,1945 4767.83,1872.83 4270.67,1872.83 ; 2397.83,1872.83 3000.67,1872.83 ; 3000.67,1872.83 3645.67,1872.83 ; 3645.67,1872.83 4270.67,1872.83
NetRR_1: RR.1 UR.1 | length 264.7
  Top Layer w10: RR.1 1979.37,1183.46 1996.54,1183.46 UR.1
pads on no net: U2_1.5 U2_1.6 U2_1.7 U2_2.5 U2_2.6 U2_2.7 U2_3.5 U2_3.6 U2_3.7 U2_4.5 U2_4.6 U2_4.7 U2_5.5 U2_5.6 U2_5.7 U2_6.5 U2_6.6 U2_6.7
copper on no net: | length 15974.4
  Top Layer w10: 5525,4845 5535,4835 ; 5540,4865 5535,4860 5535,4835 ; 5625,4962.01 5625,4915 5545,4835 5535,4835 ; 1547.99,1020 5485,1020 5485,4957.01 1547.99,4957.01 1547.99,1020 ; 7545,3685 7550,3685 7545,3685
  other v2: 1625,1100 5405,1105 1640,4860 5400,4860

## Polygon pours and split planes (outlines as drawn)
no net on Top Layer "NONET_L01_P013" (solid, pour order 13): 1540,4710 1600,4710 1850,4960 5210,4960 5210,4915 5480,4645 5480,1300 5205,1025 5200,1030 1775,1030 1775,1055 1555,1275
no net on Top Layer "NONET_L01_P010" (solid, pour order 10): 1590,4700 1810,4920 1810,4950 5185,4950 5450,4685 5425,4660 5425,1210 5405,1210 5235,1040 5225,1050 1750,1050 1750,1110 1580,1280
no net on Bottom Layer "NONET_L02_P014" (solid, pour order 14): 1560,4710 1590,4710 1840,4960 1850,4950 5215,4950 5215,4915 5480,4650 5480,1270 5475,1270 5220,1015 1740,1015 1740,1095 1550,1285

## Silkscreen, mask and mechanical layers (free items; w line width, h text height)
Top Overlay:
  lines w39.37: 4875,1880 4875,1990 ; 4875,2000 4915,1960 ; 4894.22,1894.22 4969.22,1894.22 4970,1895 4955,1895 4930,1920 4940,1920 4955,1935 4975,1935 5000,1910 5000,1890 4985,1875 4930,1875 4925,1870 4875,1870 4855,1890 4855,1900 4895,1940 4970,1940
  text "Jump Connect these" at 4759.96,2033.55 h20